# Altium PCB benchtopv4.PcbDoc
Units mil, origin at the board's own origin, x right, y up, seen from the top; angles counter-clockwise.
Board outline 11400.67 x 6976.38 mil, 2 copper layers (LV, HV); 113 components, 23 nets, 183 pads, 0 vias.
Unrouted connection lines stored in the file: 32.
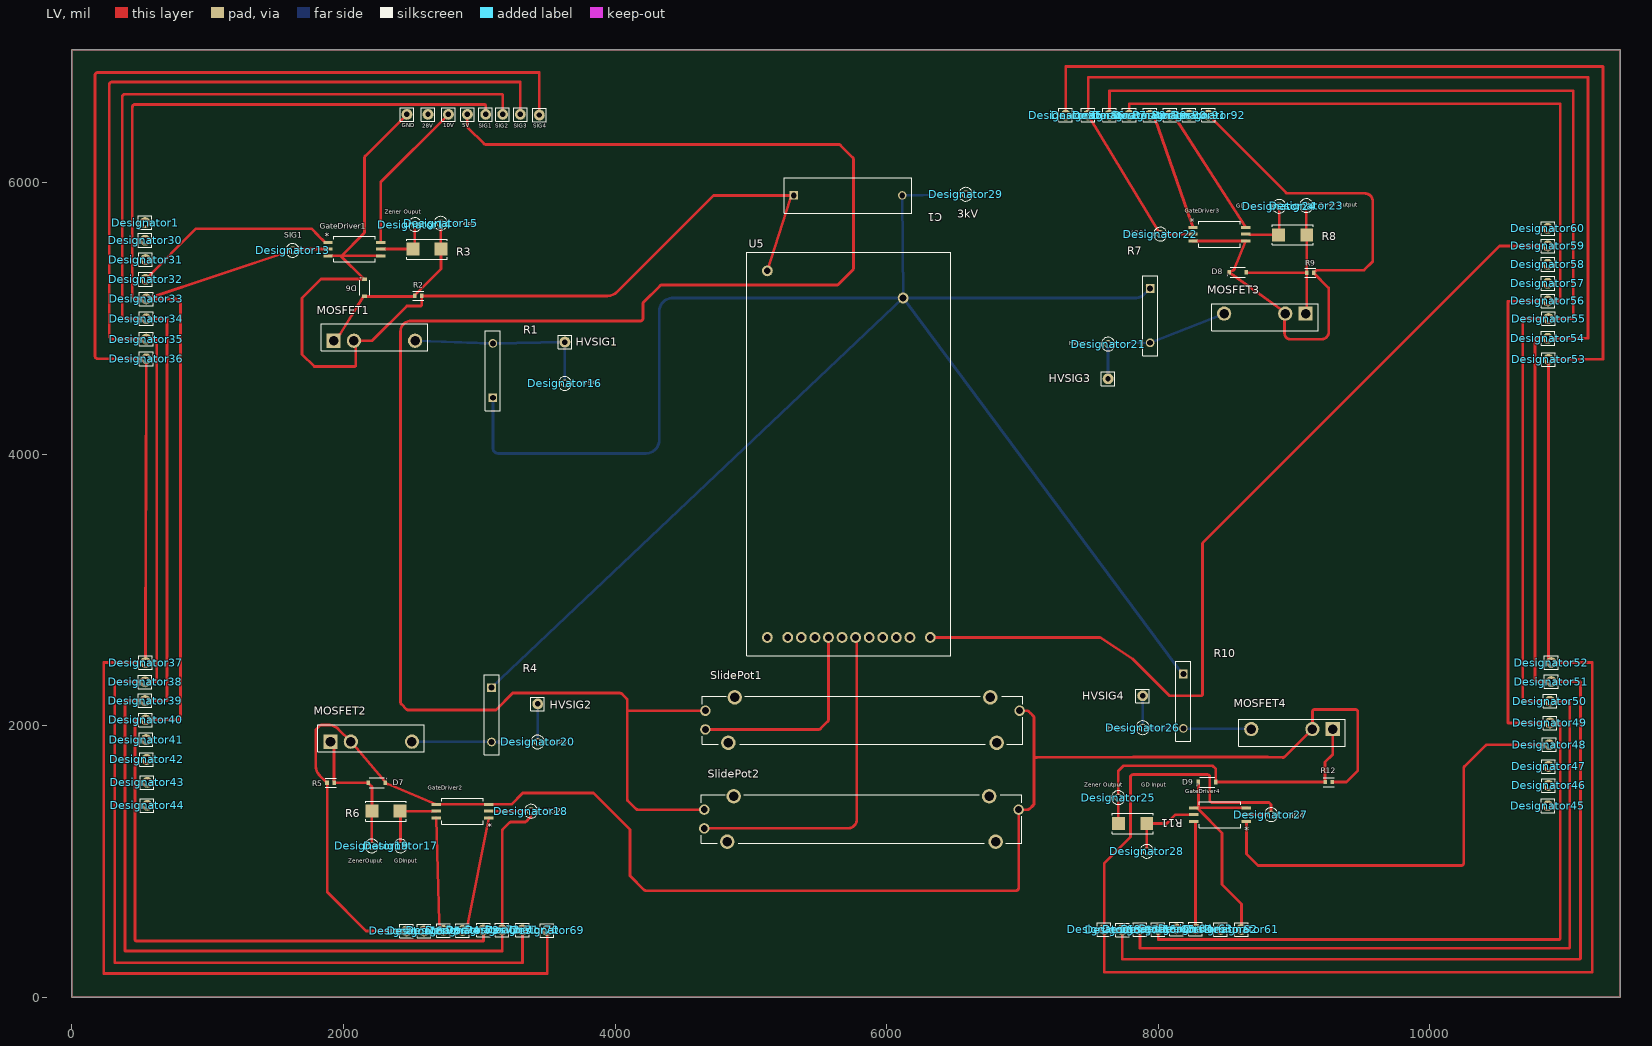
[diagram p0: LV view]
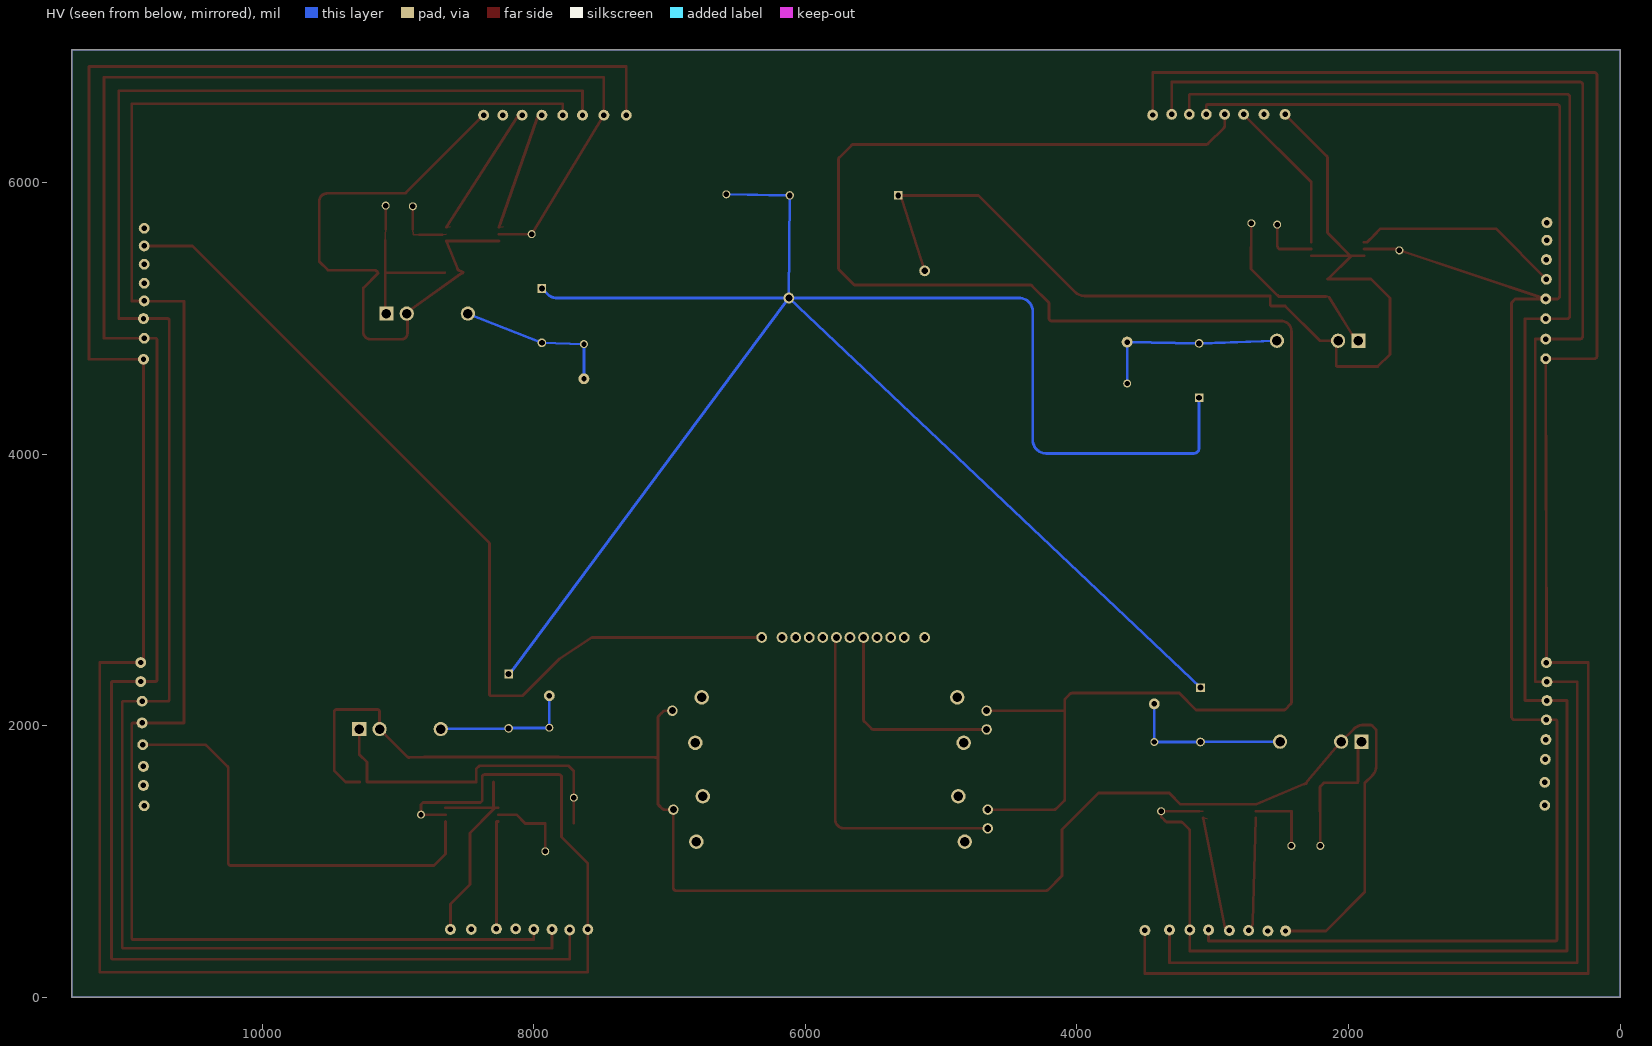
[diagram p1: HV view, seen from below]

## Layer stack, top to bottom
Top Solder: solder mask 0.4, Solder Resist, Dk 3.5
LV: signal copper 1.4
Dielectric 1: dielectric 12.6, FR-4, Dk 4.8
HV: signal copper 1.4
Bottom Solder: solder mask 0.4, Solder Resist, Dk 3.5

## Board outline
0,0 11400.67,0 11400.67,6976.38 0,6976.38

## Design rules (kind name [scope] priority, off if disabled: settings)
Clearance Clearance_1 [All] p1: gap=10 ignorepadtopadclearanceinfootprint=FALSE except(0: Arc-Hole Track-Hole SMDPad-Hole THPad-Hole Via-Hole Fill-Hole Poly-Hole Region-Hole Text-Hole)
Clearance [All] p2: gap=10 ignorepadtopadclearanceinfootprint=FALSE except(0: Arc-Hole Track-Hole SMDPad-Hole THPad-Hole Via-Hole Fill-Hole Poly-Hole Region-Hole Text-Hole)
Height [All] p1 off: minheight=0 maxheight=1000 prefheight=500
PolygonConnect [All] p1: connectstyle=Relief reliefconductorwidth=10 reliefentries=4 polygonreliefangle="90 Angle" airgapwidth=10
RoutingVias [All] p1: holewidth=28 width=50 viastyle="Through Hole" minholewidth=28 minwidth=50 maxholewidth=28 maxwidth=50
SolderMaskExpansion [All] p1: expansion=4 istentingtop=FALSE
Width [All] p1 off: maxlimit=10 minlimit=10 preferedwidth=10
29 further rules are at their usual default settings.

## Components (designator, comment, footprint, x,y, rotation, side; value= is the part's Value field where it differs from the comment)
5V "Comment" VIA 2912.09,6502.05 r0 top
10V "Comment" VIA 2772.09,6502.05 r0 top
28V "Comment" VIA 2622.09,6502.05 r0 top
C1 "27n" "HV CAPACITOR" 5315,5905 r0 top
D6 "Zener Diode" "ZENER DIODE" 2155,5225 r270 top
D7 "Zener Diode" "ZENER DIODE" 2245,1580 r180 top (schematic designator D6)
D8 "Zener Diode" "ZENER DIODE" 8585,5340 r0 top (schematic designator D6)
D9 "Zener Diode" "ZENER DIODE" 8360,1585 r0 top (schematic designator D6)
Designator1 "Via" VIA 538.46,5704.72 r0 top
Designator13 "Comment" KSTN-5003 1625,5500 r0 top
Designator14 "Comment" KSTN-5003 2525,5690 r0 top
Designator15 "Comment" KSTN-5003 2715,5700 r0 top
Designator16 "Comment" KSTN-5003 3630,4520 r0 top
Designator17 "Comment" KSTN-5003 2420.2,1114.76 r0 top
Designator18 "Comment" KSTN-5003 3380,1370 r0 top
Designator19 "Comment" KSTN-5003 2207.6,1114.76 r0 top
Designator20 "Comment" KSTN-5003 3430,1880 r0 top
Designator21 "Comment" KSTN-5003 7630,4810 r0 top
Designator22 "Comment" KSTN-5003 8015,5620 r0 top
Designator23 "Comment" KSTN-5003 9090,5830 r0 top
Designator24 "Comment" KSTN-5003 8890,5825 r0 top
Designator25 "Comment" KSTN-5003 7705,1470 r180 top
Designator26 "Comment" KSTN-5003 7885,1985 r0 top
Designator27 "Comment" KSTN-5003 8830,1345 r0 top
Designator28 "Comment" KSTN-5003 7915,1075 r180 top
Designator29 "Comment" KSTN-5003 6581.77,5913.39 r0 top
Designator30 "Comment" VIA 538.46,5574.8 r0 top
Designator31 "Comment" VIA 542.4,5432.4 r0 top
Designator32 "Comment" VIA 542.4,5287.4 r0 top
Designator33 "Comment" VIA 547.4,5142.4 r0 top
Designator34 "Comment" VIA 547.4,4997.4 r0 top
Designator35 "Comment" VIA 547.4,4847.4 r0 top
Designator36 "Comment" VIA 547.4,4702.4 r0 top
Designator37 "Comment" VIA 542.4,2464.57 r0 top
Designator38 "Comment" VIA 538.46,2322.83 r0 top
Designator39 "Comment" VIA 538.46,2185.04 r0 top
Designator40 "Comment" VIA 542.4,2043.31 r0 top
Designator41 "Comment" VIA 546.34,1897.64 r0 top
Designator42 "Comment" VIA 550.28,1751.97 r0 top
Designator43 "Comment" VIA 554.21,1582.68 r0 top
Designator44 "Comment" VIA 554.21,1413.39 r0 top
Designator45 "Comment" VIA 10869.02,1410.32 r0 top
Designator46 "Comment" VIA 10874.02,1560.32 r0 top
Designator47 "Comment" VIA 10874.02,1700.32 r0 top
Designator48 "Comment" VIA 10879.02,1860.32 r0 top
Designator49 "Comment" VIA 10884.02,2020.32 r0 top
Designator50 "Comment" VIA 10884.02,2180.31 r0 top
Designator51 "Comment" VIA 10894.02,2325.31 r0 top
Designator52 "Comment" VIA 10894.02,2465.31 r0 top
Designator53 "Comment" VIA 10873.7,4697.95 r0 top
Designator54 "Comment" VIA 10868.7,4852.95 r0 top
Designator55 "Comment" VIA 10873.7,4997.95 r0 top
Designator56 "Comment" VIA 10868.7,5127.95 r0 top
Designator57 "Comment" VIA 10868.7,5257.95 r0 top
Designator58 "Comment" VIA 10868.7,5397.95 r0 top
Designator59 "Comment" VIA 10868.7,5532.95 r0 top
Designator60 "Comment" VIA 10868.7,5662.95 r0 top
Designator61 "Comment" VIA 8613.27,500 r0 top
Designator62 "Comment" VIA 8459.72,500 r0 top
Designator63 "Comment" VIA 8274.68,503.94 r0 top
Designator64 "Comment" VIA 8132.95,503.94 r0 top
Designator65 "Comment" VIA 7999.09,500 r0 top
Designator66 "Comment" VIA 7865.24,500 r0 top
Designator67 "Comment" VIA 7735.31,496.06 r0 top
Designator68 "Comment" VIA 7601.46,500 r0 top
Designator69 "Comment" VIA 3499.09,492.13 r0 top
Designator70 "Comment" VIA 3317.99,496.06 r0 top
Designator71 "Comment" VIA 3168.39,496.06 r0 top
Designator72 "Comment" VIA 3030.59,496.06 r0 top
Designator73 "Comment" VIA 2877.05,492.13 r0 top
Designator74 "Comment" VIA 2735.32,492.13 r0 top
Designator75 "Comment" VIA 2593.58,488.19 r0 top
Designator76 "Comment" VIA 2463.66,488.19 r0 top
Designator85 "Comment" VIA 7317.99,6496.06 r0 top
Designator86 "Comment" VIA 7483.35,6496.06 r0 top
Designator87 "Comment" VIA 7640.83,6496.06 r0 top
Designator88 "Comment" VIA 7786.5,6496.06 r0 top
Designator89 "Comment" VIA 7940.04,6496.06 r0 top
Designator90 "Comment" VIA 8085.71,6496.06 r0 top
Designator91 "Comment" VIA 8227.44,6496.06 r0 top
Designator92 "Comment" VIA 8369.17,6496.06 r0 top
GateDriver1 "Comment" "GATE DRIVER" 2080,5510 r0 top
GateDriver2 "Comment" "GATE DRIVER" 2876.89,1370.67 r180 top
GateDriver3 "Comment" "GATE DRIVER" 8450,5620 r0 top
GateDriver4 "Comment" "GATE DRIVER" 8455,1345 r180 top
GND "Comment" VIA 2467.09,6502.05 r0 top
HVSIG1 "Comment" VIA 3630,4825 r0 top
HVSIG2 "Comment" VIA 3430,2160 r0 top
HVSIG3 "Comment" VIA 7630,4555 r0 top
HVSIG4 "Comment" VIA 7885,2220 r0 top
MOSFET1 "Comment" MOSFET 1926.65,4834.65 r0 top
MOSFET2 "Comment" MOSFET 1904.06,1882.48 r0 top
MOSFET3 "Comment" MOSFET 9085,5035 r180 top
MOSFET4 "Comment" MOSFET 9285,1975 r180 top
R1 "Comment" "HV RESISTOR" 3100,4415 r90 top
R2 "Resistor" "LV RESISTOR" 2550,5165 r180 top
R3 "Comment" "ZENER RESISTOR" 2615,5510 r180 top
R4 "Comment" "HV RESISTOR" 3090,2280 r270 top
R5 "Resistor" "LV RESISTOR" 1905,1580 r0 top (schematic designator R2)
R6 "Comment" "ZENER RESISTOR" 2312.99,1370.67 r0 top
R7 "Comment" "HV RESISTOR" 7940,5220 r270 top
R8 "Comment" "ZENER RESISTOR" 8990,5615 r0 top
R9 "Resistor" "LV RESISTOR" 9120,5335 r180 top (schematic designator R2)
R10 "Comment" "HV RESISTOR" 8185,2380 r270 top
R11 "Comment" "ZENER RESISTOR" 7811.5,1280 r180 top
R12 "Resistor" "LV RESISTOR" 9255,1585 r180 top (schematic designator R2)
SIG1 "Comment" VIA 3047.09,6502.05 r0 top
SIG2 "Comment" VIA 3172.09,6502.05 r0 top
SIG3 "Comment" VIA 3302.09,6502.05 r0 top
SIG4 "Comment" VIA 3442.09,6497.05 r0 top
SlidePot1 "Comment" "SLIDE POTENTIOMETER" 4664.45,2110.24 r0 top
SlidePot2 "Comment" "SLIDE POTENTIOMETER" 4656.57,1381.89 r0 top
U5 "Step Up Converter" "STEP UP CONVERTER" 6264.84,2635.04 r90 top

## Footprints (in the part's own frame and the unit in brackets; to place one, negate y for a bottom-side part, rotate by r counter-clockwise, add the part's x,y. Pads: shape width x height; smd on the part's side, far side on the other; paste and mask are expansions set on the pad)
"GATE DRIVER" [mil] "ADuM4120"
  rect 69.53x22.08 smd paste+0 mask+0: 1(-194.13,50) 2(-194.13,0) 3(-194.13,-50) 4(194.13,-50) 5(194.13,0) 6(194.13,50)
  silkscreen extent -153,-95 153,95, body extent 0,0 10,10, height 10
"HV CAPACITOR" [mil] "SV17_AVX"
  rect 62x62 hole 42 mask+0: 1(0,0)
  round 62 hole 42 mask+0: 2(800,0)
  silkscreen extent -70,-130 870,130, body extent 0,0 10,10, height 10
"HV RESISTOR" [mil] "RES_SM10203_OHM"
  rect 64x64 hole 44 mask+0: 1(0,0)
  round 64 hole 44 mask+0: 2(400,0)
  silkscreen extent -95,-55 495,55, body extent 0,0 10,10, height 10
KSTN-5003 [mm] "Test Point, Through Hole, Dia 2.54mm"
  round 1.5 hole 1: 1(0,0)
  silkscreen extent -1.27,-1.27 1.27,1.27, body extent -1.27,-1.27 1.27,1.27, height 4.57
"LV RESISTOR" [mil] "Yageo_AC0603_IPC_C"
  rect 25.93x31.97 smd paste+0 mask+0: 1(-26.64,0) 2(26.64,0)
  silkscreen extent -40,-33 40,33, body extent -44,-22 44,22, height 10
MOSFET [mm]
  rect 2.67x2.67 hole 1.78: 1(0,0)
  round 2.67 hole 1.78: 2(3.81,0) 3(15.24,0)
  silkscreen extent -2.34,-1.85 17.58,3.17, body extent -2.34,-1.85 17.58,3.17, height 26.52
"SLIDE POTENTIOMETER" [mm] "PS4510MA1BR500"
  round 1.95 hole 1.3: 1(0,0) 2(0,-3.5) 3(58.8,0)
  round 2.7 hole 1.8: 4(5.5,2.5) 5(4.3,-6) 6(54.5,-6) 7(53.3,2.5)
  silkscreen extent -0.6,-6.25 59.4,2.75, body extent -0.6,-6.8 59.4,3.3, height 15.1
"STEP UP CONVERTER" [mil] "HRL30"
  round 80 hole 50: 1(14.57,1143.7) 2(14.57,993.7) 3(14.57,893.7) 4(14.57,793.7) 5(14.57,693.7) 6(14.57,593.7) 7(14.57,493.7) 8(14.57,393.7) 9(14.57,293.7) 10(14.57,193.7) 11(14.57,93.7) 12(14.57,-56.3) 13(2514.57,143.7) 14(2714.57,1143.7)
  silkscreen extent -120,-206 2850,1294
VIA [mil]
  round 80 hole 40: VIA(0,0)
  silkscreen extent -50,-50 50,50
"ZENER DIODE" [mil] "KDZVTR16B"
  rect 26x35 smd paste+0 mask+0: 1(-64,0) 2(64,0)
  silkscreen extent -56,-37 56,37, body extent 0,0 10,10, height 10
"ZENER RESISTOR" [mil] "BO_PWR3014"
  rect 95x95 smd paste+0 mask+0: 1(-103.5,0) 2(103.5,0)
  silkscreen extent -150,-74 150,74, body extent 0,0 10,10, height 10

## Part data
C1: library part Capacitor
D6 D7 D8 D9: "KDZVTR16B", Built_By=EMA_Matt, Copyright="Copyright (C) 2018 Accelerated Designs. All rights reserved", Manufacturer_Part_Number=KDZVTR16B, RefDes=RefDes, SourceLibrary=Rohm_2019-09-23, Type=DEV, Vendor="ROHM Semiconductor"
U5: "HRL30"

## Nets (pads, with @x,y where several pads share a name; then routed paths per layer and width w, separated by ;. In a path a pad name is that pad's centre, name@x,y a point inside that pad or via, vN(x,y) a via of type N, cw(c..) or ccw(c..) an arc to the next point about the centre after c; other vN are vias at no path point)
3kV: C1.2 Designator29.1 R1.1 R4.1 R7.1 R10.1 U5.13 | length 15284.5
  LV w10: R4.1 R4.1@3117,2307 ; R1.1@3095.07,4388 R1.1 cw(c3087.93,4402.93) R1.1@3105,4402.93 ; R7.1@7913,5247 R7.1 ; R10.1@8158,2407 R10.1
  HV w20: R4.1@3089.28,2280.77 U5.13 ; R1.1 3100,4045 ccw(c3140.53,4045.08) 3118.78,4010.88 ccw(c3139.15,4043.22) 3139.21,4005 4225,4005 ccw(c4225,4105) 4325,4105 4325,5049.61 cw(c4425,5049.61) 4425,5149.61 U5.13 ; Designator29.1 C1.2 U5.13 ; R7.1 7898.9,5178.9 cw(c7828.18,5249.61) 7828.18,5149.61 U5.13 ; R10.1@8158,2407 U5.13
5V: 5V.VIA Designator32.VIA Designator41.VIA Designator48.VIA Designator57.VIA Designator64.VIA Designator73.VIA Designator89.VIA GateDriver1.1 GateDriver2.1 GateDriver3.1 GateDriver4.1 SlidePot1.1 SlidePot2.1 | length 20532.4
  LV w10: GateDriver2.1@3041.25,1314.63 GateDriver2.1 ; GateDriver3.1@8226.11,5676.04 GateDriver3.1
  LV w20: Designator32.VIA 915,5660 1765,5660 1813.06,5611.94 1813.06,5609.09 1862.15,5560 GateDriver1.1 ; Designator73.VIA 2903.1,509.51 ccw(c2892,526.15) 2911.6,522.17 3070.04,1315.8 ccw(c3050.41,1319.63) 3070.41,1319.63 GateDriver2.1 ; 5V.VIA 2912.09,6416.2 ccw(c2932.09,6416.2) 2917.91,6402.09 3034.2,6285.8 ccw(c3048.28,6300) 3048.22,6280 5646.72,6280 cw(c5646.72,6260) 5660.8,6274.2 5749.18,6185.82 cw(c5735,6171.72) 5755,6171.72 5755,5368.28 cw(c5735,5368.28) 5749.2,5354.2 5645.82,5250.82 cw(c5631.72,5265) 5631.72,5245 4343.28,5245 4343.22,5245 ccw(c4343.28,5225) 4329.18,5239.18 4210.8,5120.8 ccw(c4225,5106.72) 4205,5106.78 4205,5000 cw(c4185,5000) 4185.06,4980 2495,4980 ccw(c2495,4905) 2420,4905 2420,2173.28 ccw(c2440,2173.28) 2425.81,2159.19 2464.2,2120.8 ccw(c2478.28,2135) 2478.22,2115 3117.41,2115 ; 3122.26,2116.25 3246.01,2240 4036.72,2240 cw(c4036.72,2220) 4050.8,2234.2 4084.18,2200.82 cw(c4070,2186.72) 4090,2186.72 4090,2110.24 ; SlidePot2.1 4166.33,1381.89 cw(c4166.39,1401.89) 4152.31,1387.69 4095.82,1444.18 cw(c4110,1458.28) 4090,1458.28 4090,2110.24 ; SlidePot1.1 4090,2110.24 ; Designator89.VIA 7965.84,6483.61 cw(c7957.14,6465.6) 7976.03,6472.19 8244.47,5702.68 ; Designator64.VIA 8146.6,513.03 ccw(c8135.51,529.67) Designator64.VIA@8155.12,525.73 ; 8244.48,5702.65 cw(c8225.65,5695.91) 8244.51,5702.57 8253.24,5677.56 cw(c8234.33,5671.04) 8254.33,5671.04 GateDriver3.1 ; GateDriver4.1 8649.13,1055.87 8735,970 10230,970 ccw(c10230,990) 10250,990 10250,1686.78 cw(c10270,1686.72) 10255.8,1700.8 10409.49,1854.49 cw(c10423.6,1840.31) 10423.54,1860.31 10423.6,1860.32 Designator48.VIA
10V: 10V.VIA Designator31.VIA Designator42.VIA Designator47.VIA Designator58.VIA Designator63.VIA Designator74.VIA Designator90.VIA GateDriver1.6 GateDriver2.6 GateDriver3.6 GateDriver4.6 | length 3828.1
  LV w10: GateDriver3.6@8614.36,5676.04 GateDriver3.6
  LV w20: GateDriver1.6 2274.13,6004.09 10V.VIA ; GateDriver2.6@2682.71,1320.26 2682.73,1319.63 ccw(c2702.73,1319.63) 2682.74,1319.19 2703.97,552.76 cw(c2683.98,552.21) 2703.97,552.61 ccw(c2780.77,554.89) 2727.97,499.07 Designator74.VIA ; Designator90.VIA 8107.67,6491.32 cw(c8103.44,6471.77) 8120.23,6482.64 8636.52,5681.8 cw(c8619.66,5671.04) 8639.66,5671.04 GateDriver3.6 ; GateDriver4.6 8273.65,1295 8274.68,1293.96 Designator63.VIA
28V: 28V.VIA Designator30.VIA Designator43.VIA Designator46.VIA Designator59.VIA Designator62.VIA Designator75.VIA Designator91.VIA U5.12 | length 6733.5
  LV w10: 7570,2649.61 cw(c7570,2639.61) 7577.07,2646.68 ; 8080.84,2222.91 ccw(c8087.89,2230) 8087.85,2220 ; 8325,3340.86 cw(c8335,3340.86) 8327.93,3347.93
  LV w20: U5.12 7570,2649.61 ; 7577.07,2646.68 7812.07,2491.68 8080.84,2222.91 ; 8087.85,2220 8315,2220 ccw(c8315,2230) 8325,2230 8325,3340.86 ; 8327.93,3347.93 10512.95,5532.95 Designator59.VIA
GND: C1.1 D6.1 D7.1 D8.1 D9.1 Designator1.VIA Designator44.VIA Designator45.VIA Designator60.VIA Designator61.VIA Designator76.VIA Designator92.VIA GateDriver1.3 GateDriver1.4 GateDriver2.3 GateDriver2.4 GateDriver3.3 GateDriver3.4 GateDriver4.3 GateDriver4.4 GND.VIA MOSFET1.2 MOSFET2.2 MOSFET3.2 MOSFET4.2 R2.1 R5.1 R9.1 R12.1 SlidePot1.3 SlidePot2.3 U5.14 | length 26547.2
  LV w10: R5.1 R5.1@1880,1578.36 ; MOSFET1.2 MOSFET1.2@2090,4821.3 ; C1.1@5289,5879 C1.1 ; MOSFET3.2@8930,5030 MOSFET3.2 ; R9.1@9146.64,5331.98 R9.1 9146.64,5338.02 R9.1@9154.61,5345.99
  LV w20: R5.1 1824.29,1634.07 cw(c1895,1704.78) 1795,1704.78 1795,1961.78 cw(c1815,1961.72) 1800.8,1975.8 1824.18,1999.18 cw(c1838.28,1985) 1838.22,2005 1838.28,2005 1890.11,2005 cw(c1890.11,1905) 1960.82,1975.71 MOSFET2.2 D7.1@2301,1592.5 ; R5.1@1880,1578.36 1880,775 2166.81,488.19 Designator76.VIA ; GateDriver1.3 1979.5,5460 ; MOSFET1.2 2211.02,4834.65 2466.37,5090 2569.14,5090 2576.64,5097.5 R2.1 3943.58,5165 ccw(c3943.58,5265) 4014.29,5194.29 4725,5905 C1.1 ; MOSFET1.2@2090,4821.3 2090,4650.86 2084.14,4645 1785,4645 1695,4735 1695,5150 1834,5289 D6.1@2150.5,5289 ; D6.1 D6.1@2150.5,5289 ; GateDriver1.4 1985,5460 ; D7.1 2312,1572.83 2315.61,1572.83 cw(c2315.61,1552.83) 2323.34,1571.27 2680.28,1421.71 GateDriver2.4 GateDriver2.3 3235.67,1420.67 3320,1505 3840,1505 4110,1235 4110,895 4214.14,790.86 4214.18,790.82 ccw(c4228.28,805) 4228.28,785 6951.6,785 ccw(c6951.54,805) 6971.54,805 SlidePot2.3 7038.61,1381.89 ccw(c7038.61,1401.89) 7052.71,1387.71 7079.2,1414.2 ccw(c7065,1428.28) 7085,1428.28 7085,1765 ; GND.VIA 2160.86,6195.82 ccw(c2175,6181.68) 2155,6181.68 2155,5638.28 cw(c2135,5638.28) 2149.14,5624.14 1985,5460 ; U5.14 C1.1@5289,5879 ; SlidePot1.3 7031.42,2110.24 cw(c7031.42,2090.24) 7045.52,2104.41 7057.74,2092.26 7079.1,2070.9 7079.18,2070.82 cw(c7064.88,2056.84) 7081.91,2067.33 7082.03,2067.12 cw(c7065,2056.64) 7085,2056.78 7085,2056.72 7085,1765 ; GateDriver3.3 GateDriver3.4 8642.14,5568.96 cw(c8622.14,5568.96) 8640.71,5561.54 8560.65,5363.21 cw(c8542.1,5370.69) 8549.92,5352.29 8525.74,5342.01 D8.1 8524,5332.5 8524,5334.06 cw(c8522.73,5314.1) 8529.62,5332.88 8532.19,5331.93 8927.05,5047.47 cw(c8915.36,5031.24) MOSFET3.2 ; GateDriver4.4 GateDriver4.4@8284.6,1395 ; D9.1 8296,1406.4 GateDriver4.4@8284.6,1395 ; Designator92.VIA 8939.38,5925.86 ; Designator61.VIA 8613.27,686.73 8470,830 8470,1209.96 8301.5,1378.47 8301.13,1378.47 GateDriver4.4@8284.6,1395 ; GateDriver4.3 GateDriver4.4@8284.6,1395 ; MOSFET3.2@8930,5030 8930,4890 ccw(c8975,4890) 8975,4845 9200.01,4845 9200.07,4845 ccw(c9199.92,4900.08) 9255,4900.17 9255,5223.62 R9.1@9146.64,5331.98 ; R9.1@9154.61,5345.99 9157.63,5345.99 9166.64,5355 9515,5355 9580,5420 9580,5860 ccw(c9520,5860) 9520,5920 8953.52,5920 cw(c8953.52,5940) 8939.41,5925.82 ; R12.1@9281.64,1588.02 R12.1 9385,1585 9470,1670 9470,2100 ccw(c9450,2100) 9450,2120 9154.94,2120 ccw(c9155,2100) 9135,2100.06 MOSFET4.2 8930.86,1770.86 cw(c8916.72,1785) 8916.82,1765 cw(c8916.72,1785) 8915.81,1765.02 8807.35,1769.94 ccw(c8805,1720) 8805,1770 7814.9,1770 ccw(c7815,1720) 7814.65,1770 7389.99,1767.01 7105.11,1765 cw(c7105,1785) 7105.02,1765 7085,1765 ; 1979.5,5460 1985,5460 ; 1979.5,5460 D6.1@2150.5,5289 ; 8939.38,5925.86 8939.41,5925.82
HVSIG1: Designator16.1 HVSIG1.VIA MOSFET1.3 R1.2 | length 1408.8
  HV w20: MOSFET1.3 R1.2 HVSIG1.VIA Designator16.1
HVSIG2: Designator20.1 HVSIG2.VIA MOSFET2.3 R4.2 | length 1205.9
  HV w20: MOSFET2.3 R4.2@3090,1882.48 ; R4.2 Designator20.1 HVSIG2.VIA
HVSIG3: Designator21.1 HVSIG3.VIA MOSFET3.3 R7.2 | length 1151
  HV w20: HVSIG3.VIA Designator21.1 R7.2 MOSFET3.3
HVSIG4: Designator26.1 HVSIG4.VIA MOSFET4.3 R10.2 | length 1025
  HV w20: Designator26.1 HVSIG4.VIA ; Designator26.1@7887.5,1982.5 R10.2@8182.5,1982.5 ; R10.2@8187.5,1977.5 MOSFET4.3@8682.5,1977.5
IPGM: SlidePot2.2 U5.7 | length 2503.5
  LV w20: SlidePot2.2 5714.09,1244.09 ccw(c5714.09,1310) 5780,1310 5780,2632.46 ccw(c5760,2632.46) 5774.14,2646.61 U5.7
NetD1: D6.2 Designator15.1 MOSFET1.1 R2.2 R3.1 | length 1443
  LV w10: MOSFET1.1@1926.44,4882.2 MOSFET1.1 MOSFET1.1@1974.21,4882.2 ; D6.2@2142.5,5153 D6.2 D6.2@2167.5,5161.14 ; R2.2@2515.39,5165.04 2515.41,5165.43 R2.2@2515.99,5175.99
  LV w20: MOSFET1.1@1974.21,4882.2 D6.2@2142.5,5153 ; D6.2@2167.5,5161.14 2515.39,5161.14 2718.5,5364.24 R3.1 2715,5547.5 Designator15.1
NetD2: D7.2 Designator19.1 MOSFET2.1 R5.2 R6.1 | length 1028
  LV w10: MOSFET2.1 MOSFET2.1@1930.64,1855.9
  LV w20: R5.2@1930.64,1590.99 MOSFET2.1@1930.64,1855.9 ; R5.2 D7.2 2203.63,1557.37 cw(c2189.49,1543.22) 2209.49,1543.22 R6.1 ; Designator19.1 R6.1@2207.6,1370.67
NetD3: D8.2 Designator23.1 MOSFET3.1 R8.2 R9.2 | length 1244.4
  LV w10: D8.2 D8.2@8657,5335.09 ; MOSFET3.1 MOSFET3.1@9093.36,5043.36 ; R9.2@9085.39,5335.09 R9.2 R9.2@9093.36,5345.99 ; R8.2@9090,5657.5 R8.2 R8.2@9093.36,5572.5
  LV w20: D8.2@8657,5335.09 R9.2@9085.39,5335.09 ; R8.2@9090,5657.5 Designator23.1 ; MOSFET3.1@9093.36,5043.36 R9.2 ; R9.2@9093.36,5345.99 R8.2@9093.36,5572.5
NetD4: D9.2 Designator25.1 MOSFET4.1 R11.2 R12.2 | length 2462.9
  LV w20: R11.2@7705,1283 Designator25.1 7705,1665 7745,1705 8400,1705 8424,1681 D9.2 R12.2 9228.36,1731.91 9285,1788.55 MOSFET4.1 9289.14,1970.86 cw(c9275,1956.72) MOSFET4.1@9295,1956.72
NetR1: Designator14.1 GateDriver1.5 R3.2 | length 421
  LV w20: GateDriver1.5 R3.2 ccw(c2478.91,5542.59) 2525,5542.59 Designator14.1
NetR2: Designator17.1 GateDriver2.5 R6.2 | length 518.5
  LV w20: Designator17.1 2420.2,1370.67 GateDriver2.5
NetR3: Designator24.1 GateDriver3.5 R8.1 | length 452.8
  LV w10: GateDriver3.5 GateDriver3.5@8673.89,5615.88 ; R8.1@8844,5615.88 R8.1 R8.1@8890,5657.5
  LV w20: GateDriver3.5@8673.89,5615.88 R8.1@8844,5615.88 ; R8.1@8890,5657.5 Designator24.1
NetR4: Designator28.1 GateDriver4.5 R11.1 | length 577.8
  LV w20: Designator28.1 R11.1 8062.32,1280 8127.32,1345 GateDriver4.5
SIG1: Designator13.1 Designator33.VIA Designator40.VIA Designator49.VIA Designator56.VIA Designator65.VIA Designator72.VIA Designator88.VIA GateDriver1.2 SIG1.VIA | length 26737.9
  LV w10: Designator56.VIA@10868.7,5125 Designator56.VIA
  LV w20: Designator13.1@1638.66,5505.72 ccw(c1639.01,5485.73) Designator13.1 ; GateDriver1.2 1649.14,5510 ccw(c1649.14,5475.86) Designator13.1 ; Designator72.VIA 3030.59,415 474.96,415 cw(c475,425) 465,424.96 465,2033.31 cw(c475,2033.31) 475,2043.31 Designator40.VIA 783.31,2043.31 794.14,2054.14 ccw(c780,2068.28) 800,2068.28 800,5106.72 ccw(c780,5106.72) 794.14,5120.86 772.6,5142.4 Designator33.VIA ; SIG1.VIA 3047.09,6565 ccw(c3037.09,6565) 3037.09,6575 465,6575 ccw(c465,6555) 445,6555 445,5162.34 ccw(c465,5162.4) 464.94,5142.4 Designator33.VIA ; Designator88.VIA 7786.5,6580 10960,6580 10960,5127.95 Designator56.VIA ; Designator65.VIA 7999.09,425 10950,425 ccw(c10950,435) 10960,435 10960,2010.36 ccw(c10950,2010.32) 10950,2020.32 Designator49.VIA 10575,2020.32 10575,5125 Designator56.VIA@10868.7,5125 ; Designator33.VIA Designator13.1
SIG2: Designator18.1 Designator34.VIA Designator39.VIA Designator50.VIA Designator55.VIA Designator66.VIA Designator71.VIA Designator87.VIA GateDriver2.2 SIG2.VIA | length 28067.8
  LV w10: GateDriver2.2 3091.83,1370.67 GateDriver2.2@3092.3,1370.19 ; GateDriver2.2@3097.87,1364.63 GateDriver2.2@3092.3,1370.19 ; GateDriver2.2@3100.78,1370 GateDriver2.2@3092.3,1370.19 ; Designator87.VIA@7640,6496.06 Designator87.VIA ; Designator50.VIA@10884.02,2180 Designator50.VIA
  LV w20: Designator39.VIA@538.46,2185 700,2185 700,4997.4 Designator34.VIA 389.94,4997.4 cw(c390,5017.4) 370,5017.34 370,6630 cw(c390,6630) 390,6650 3162.09,6650 cw(c3162.09,6640) 3172.09,6640 SIG2.VIA ; Designator39.VIA 390,2185.04 390,340 3168.39,340 Designator71.VIA 3168.39,1225.16 cw(c3188.39,1225.1) 3174.19,1239.19 3219.49,1284.49 cw(c3233.6,1270.32) 3233.54,1290.32 3233.6,1290.32 3332.03,1290.32 ccw(c3332.03,1310.32) 3346.14,1296.14 3374.2,1324.2 ccw(c3360,1338.28) 3380,1338.28 Designator18.1 GateDriver2.2@3100.78,1370 ; Designator87.VIA 7640.83,6675 11055,6675 11055,4997.95 Designator55.VIA 10695,4997.95 ccw(c10695,4987.95) 10685,4987.95 10685,2189.96 ccw(c10695,2190) 10694.96,2180 Designator50.VIA@10884.02,2180 ; Designator66.VIA 7865.24,360 11020,360 ccw(c11020,370) 11030,370 11030,2170.36 ccw(c11020,2170.31) 11020,2180.32 Designator50.VIA
SIG3: Designator22.1 Designator35.VIA Designator38.VIA Designator51.VIA Designator54.VIA Designator67.VIA Designator70.VIA Designator86.VIA GateDriver3.2 SIG3.VIA | length 29657.1
  LV w10: Designator67.VIA@7735,496.06 Designator67.VIA
  LV w20: SIG3.VIA 3302.09,6740 295,6740 ccw(c295,6720) 275,6720 275,4867.34 ccw(c295,4867.4) 294.94,4847.4 Designator35.VIA 625,4847.4 625,2322.83 Designator38.VIA 315,2322.83 315,255 3317.99,255 Designator70.VIA ; Designator67.VIA 7735.31,280 11100,280 ccw(c11100,290) 11110,290 11110,2315.36 ccw(c11100,2315.31) 11100,2325.32 Designator51.VIA 10784.96,2325.31 cw(c10785,2335.31) 10775,2335.27 10775,4842.95 cw(c10785,4842.95) 10785,4852.95 Designator54.VIA 11165,4852.95 11165,6775 7483.35,6775 Designator86.VIA Designator22.1 GateDriver3.2
SIG4: Designator27.1 Designator36.VIA Designator37.VIA Designator52.VIA Designator53.VIA Designator68.VIA Designator69.VIA Designator85.VIA GateDriver4.2 SIG4.VIA | length 32787.3
  LV w10: Designator69.VIA@3500,492.13 Designator69.VIA Designator69.VIA@3503.03,496.06 ; Designator85.VIA Designator85.VIA@7317.99,6497.05 ; Designator52.VIA@10873.7,2475.27 ccw(c10883.7,2475.31) 10883.66,2465.32 Designator52.VIA
  LV w20: SIG4.VIA 3442.09,6810 190,6810 ccw(c190,6790) 170,6790 170,4722.34 ccw(c190,4722.4) 189.94,4702.4 Designator36.VIA Designator37.VIA 235,2464.57 235,175 3500,175 Designator69.VIA@3500,492.13 ; Designator85.VIA@7317.99,6497.05 7317.99,6855 11275,6855 11275,4697.95 Designator53.VIA Designator52.VIA@10873.7,2475.27 ; GateDriver4.2 Designator27.1 8830,1420 8815,1435 8391.72,1435 8380,1446.72 8380,1620 ccw(c8360,1620) 8360,1640 7814.94,1640 ccw(c7815,1620) 7795,1620.06 7795,1180 7601.46,986.46 Designator68.VIA 7601.46,185 11195,185 11195,2465.31 Designator52.VIA
VPGM: SlidePot1.2 U5.5 | length 1544.8
  LV w20: SlidePot1.2 5499.16,1972.44 ccw(c5499.16,1992.44) 5513.26,1978.26 5565.34,2030.34 ccw(c5551.14,2044.43) 5571.14,2044.43 U5.5
pads on no net: SlidePot1.4 SlidePot1.5 SlidePot1.6 SlidePot1.7 SlidePot2.4 SlidePot2.5 SlidePot2.6 SlidePot2.7 U5.1 U5.2 U5.3 U5.4 U5.6 U5.8 U5.9 U5.10 U5.11

## Other copper
Multi-Layer:
  lines w10: 0,0 11401.57,0 11401.57,6976.38 0,6976.38 0,0

## Silkscreen, mask and mechanical layers (free items; w line width, h text height)
Top Overlay:
  text "Zener Output" at 9185,5820 h30
  text "GD Input" at 8575,5815 h30
  text "Zener Ouput" at 2305,5770 h30
  text "3kV" at 6520.91,5742.28 h60
  text "GD Input" at 2800,5685 h30
  text "SIG3" at 7765,5605 h40
  text "SIG1" at 1565,5595 h40
  text "HVSIG3" at 7345,4800 h30
  text "HVSIG1" at 3740,4510 h30
  text "HVSIG4" at 7630,1965 h30
  text "HVSIG2" at 3520,1865 h30
  text "Zener Output" at 7455,1550 h30
  text "GD Input" at 7875,1550 h30
  text "SIG2" at 3470,1350 h40
  text "SIG4" at 8945,1320 h40
  text "ZenerOuput" at 2035,990 h30
  text "GDInput" at 2375,990 h30

## Text inside footprints (layer, text, board x,y; h text height)
D6: Top Overlay "*" at 2116,5304 h20 r270; Mechanical 13 "*" at 2130,5278.5 h50 r270
D7: Top Overlay "*" at 2324,1619 h20 r180; Mechanical 13 "*" at 2298.5,1605 h50 r180
D8: Top Overlay "*" at 8506,5301 h20; Mechanical 13 "*" at 8531.5,5315 h50
D9: Top Overlay "*" at 8281,1546 h20; Mechanical 13 "*" at 8306.5,1560 h50
GateDriver1: Top Overlay "*" at 1863.37,5577.08 h50; Mechanical 13 "*" at 1934.86,5547.06 h50
GateDriver2: Top Overlay "*" at 3093.52,1303.59 h50 r180; Mechanical 13 "*" at 3022.03,1333.61 h50 r180
GateDriver3: Top Overlay "*" at 8233.37,5687.08 h50; Mechanical 13 "*" at 8304.86,5657.06 h50
GateDriver4: Top Overlay "*" at 8671.63,1277.92 h50 r180; Mechanical 13 "*" at 8600.14,1307.94 h50 r180